# Altium PCB 贴锁控制板201105.PcbDoc
Units mm, origin at the board's own origin, x right, y up, seen from the top; angles counter-clockwise.
Board outline 47.43 x 32.39 mm, 2 copper layers (Top Layer, Bottom Layer); 70 components, 53 nets, 217 pads, 159 vias.
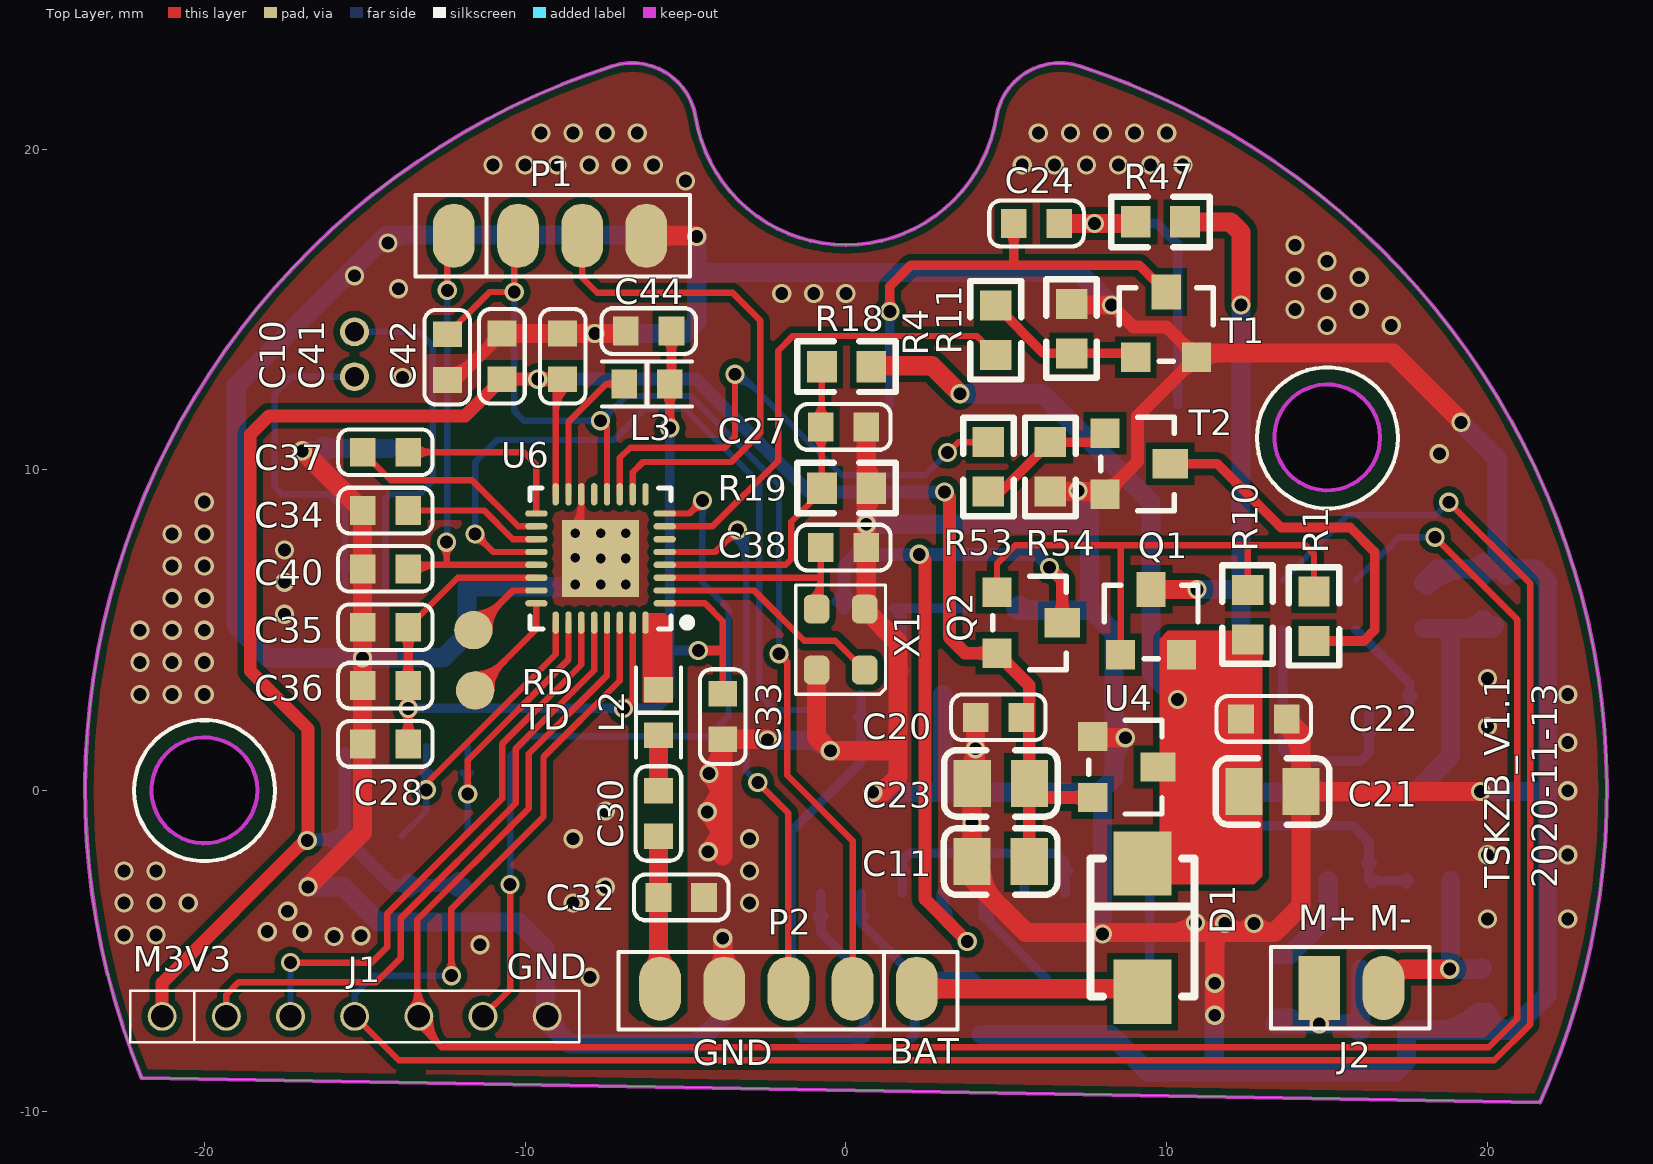
[diagram p0: Top Layer view]
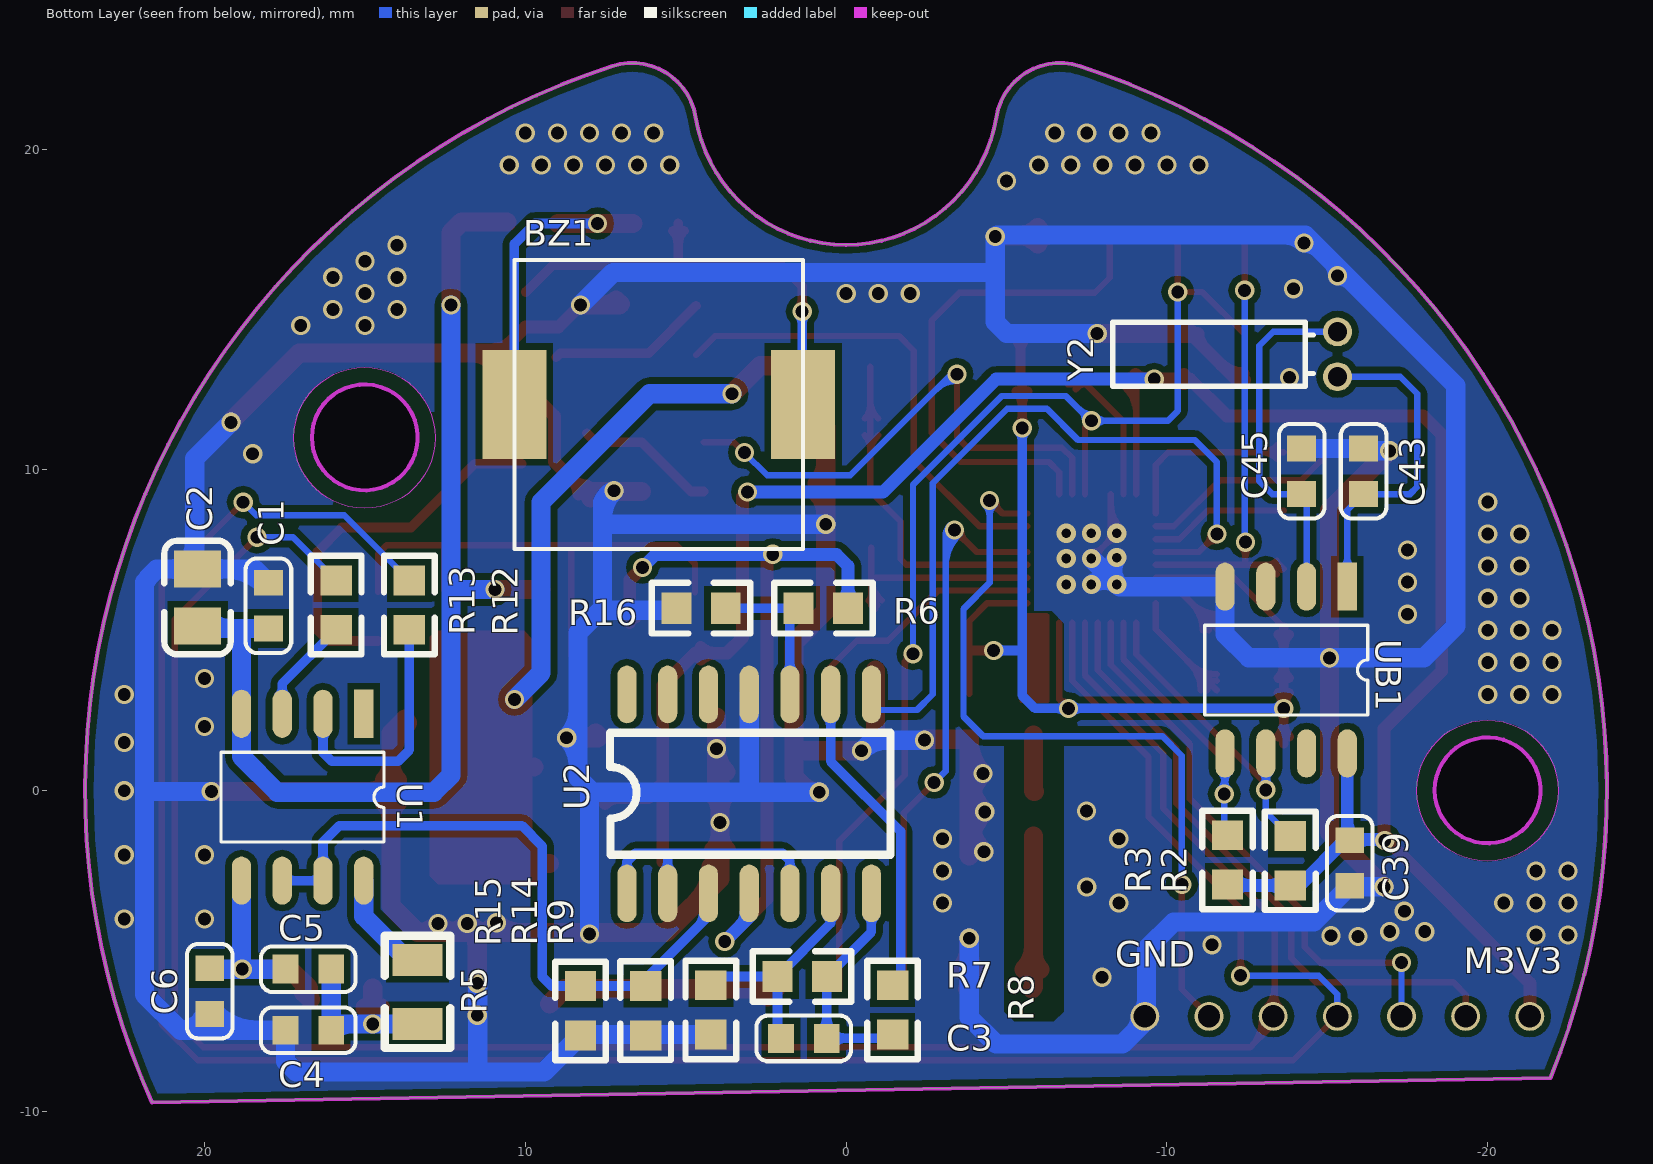
[diagram p1: Bottom Layer view, seen from below]
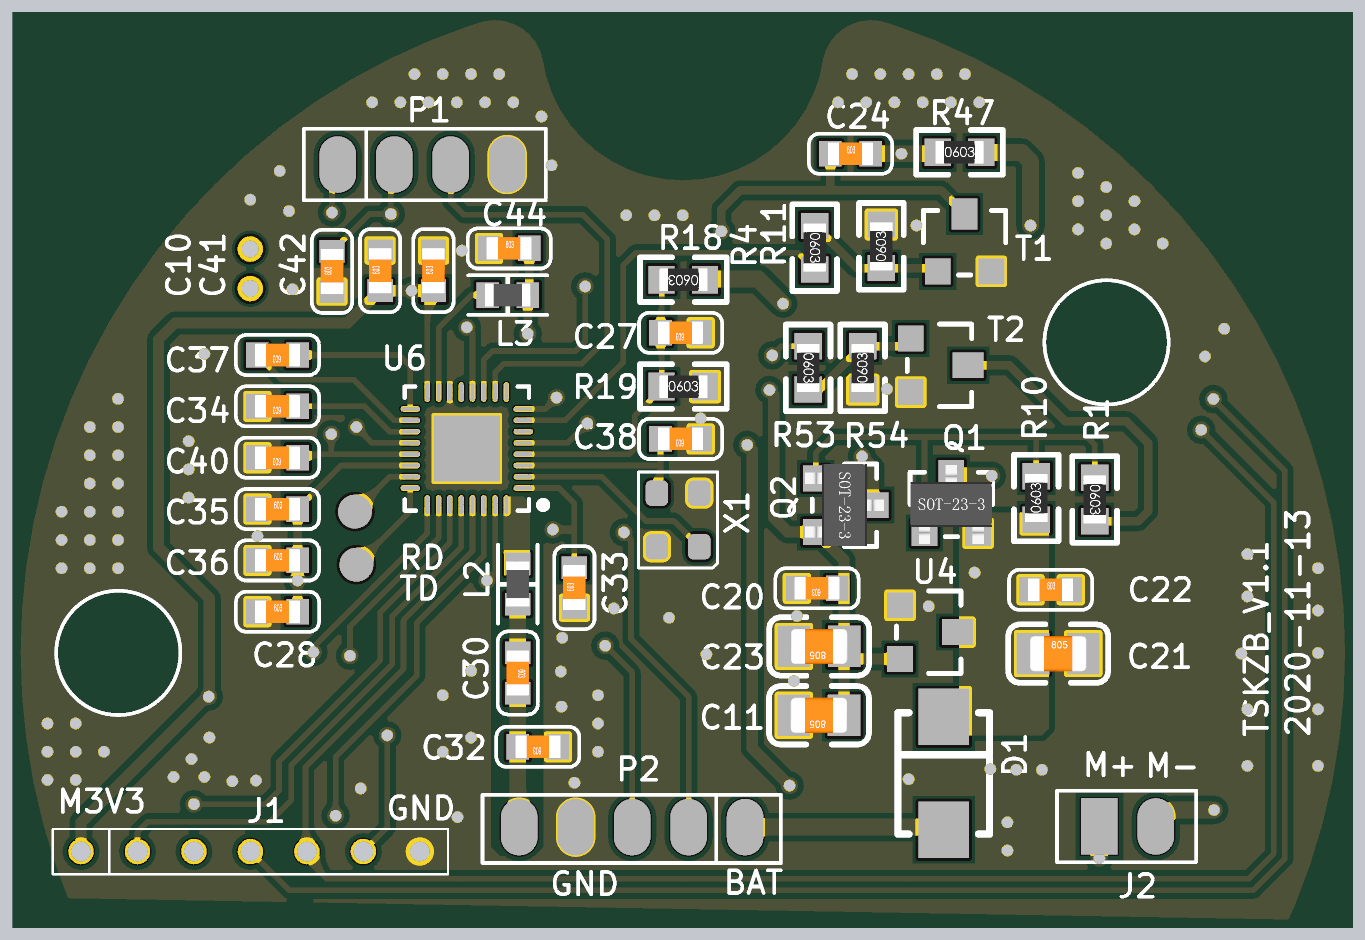
[diagram p2: 3D render of the assembled board from above, using the file's embedded part models]
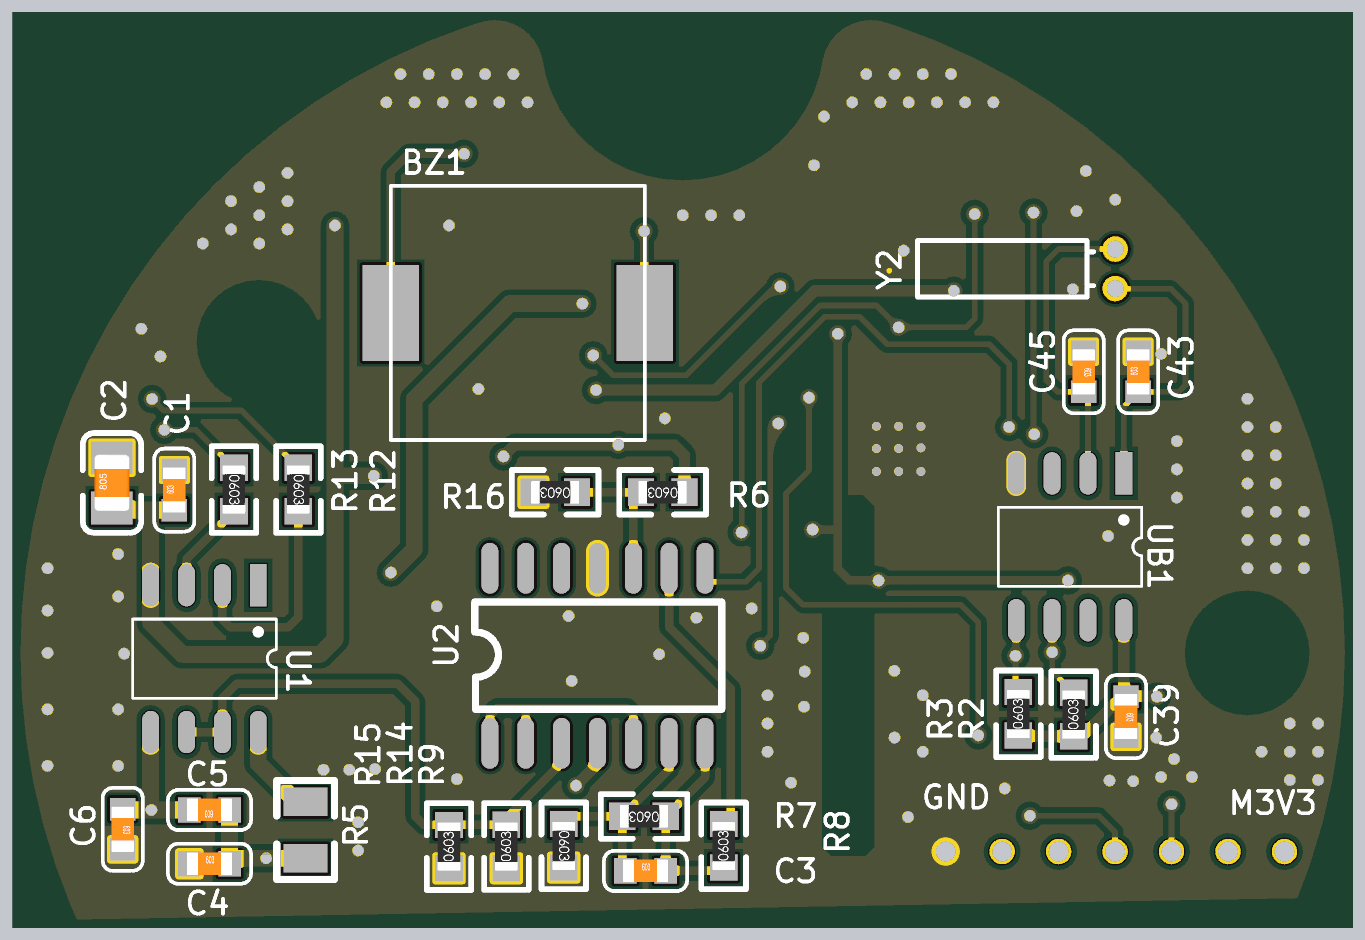
[diagram p3: 3D render of the assembled board from below, using the file's embedded part models]

## Layer stack, top to bottom
Top Layer: signal copper 0.0356
Dielectric: dielectric 0.32, FR-4, Dk 4.8
Bottom Layer: signal copper 0.0356

## Board outline
-21.952,-8.954 21.636,-9.715 ccw(c0.005,0.012) 7.281,22.585 ccw(c6.668,20.681) 4.694,21.001 cw(c0.005,21.762) -4.684,21.001 ccw(c-6.658,20.681) -7.272,22.585 ccw(c0.005,0.012)
cut-out: -21.645,0.012 ccw(c-19.995,0.012) -19.995,-1.638 ccw(c-19.995,0.012) -18.345,0.012 ccw(c-19.995,0.012) -19.995,1.662 ccw(c-19.995,0.012)
cut-out: 13.355,11.012 ccw(c15.005,11.012) 15.005,9.362 ccw(c15.005,11.012) 16.655,11.012 ccw(c15.005,11.012) 15.005,12.662 ccw(c15.005,11.012)

## Design rules (kind name [scope] priority, off if disabled: settings)
Clearance Clearance_1 [All] p1 off: gap=0.3
Clearance [All] p2: gap=0.2
HoleToHoleClearance [All] p1: gap=0 allowstackedmicrovias=TRUE
MinimumSolderMaskSliver [All] p1: minsoldermaskwidth=0
PolygonConnect [All] p1: connectstyle=Direct reliefconductorwidth=0.254 reliefentries=4 polygonreliefangle="90 Angle" airgapwidth=0.254
RoutingVias [All] p1: holewidth=0.4 width=0.6 viastyle="Through Hole" minholewidth=0.3 minwidth=0.5 maxholewidth=0.4 maxwidth=0.6
SilkToSilkClearance [All] p1: silktosilkclearance=0
SilkToSolderMaskClearance [IsPad] p1: minsilkscreentomaskgap=0 clearancetoexposedcopper=TRUE
SolderMaskExpansion [All] p1: expansion=0.102
Width [All] p1: maxlimit=1.5 minlimit=0.1 preferedwidth=0.3
24 further rules are at their usual default settings.

## Components (designator, comment, footprint, x,y, rotation, side; value= is the part's Value field where it differs from the comment)
BZ1 "BUZZER" BUZZER_9*9*1.8 5.842,12.04 r180 bottom
C1 "0.1uF" 0603C 18.009,5.766 r90 bottom
C2 "22uF" LC-0805_C 20.218,6.02 r90 bottom
C3 "0.1uF" 0603C 1.321,-7.722 r180 bottom
C4 "100nF" 0603C 16.764,-7.468 r180 bottom
C5 "100nF" 0603C 16.764,-5.563 r0 bottom
C6 "100nF" 0603C 19.837,-6.248 r270 bottom
C10 "NC" 0603C -12.421,13.513 r90 top
C11 "22uF" LC-0805_C 4.826,-2.21 r180 top
C20 "0.1uF" 0603C 4.755,2.286 r180 top
C21 "22uF/10V" LC-0805_C 13.298,-0.025 r0 top
C22 "0.1uF" 0603C 13.03,2.235 r0 top
C23 "10uF/10V" LC-0805_C 4.832,0.229 r180 top
C24 "10uF/10V" 0603C 5.944,17.678 r0 top
C27 "1nF" 0603C -0.076,11.338 r180 top
C28 "1uF/6.3V" 0603C -14.351,1.457 r0 top
C30 "1.5pF" 0603C -5.842,-0.711 r270 top
C32 "1pF" 0603C -5.131,-3.327 r180 top
C33 "0.1uF" 0603C -3.835,2.311 r90 top
C34 "0.1uF" 0603C -14.351,8.732 r180 top
C35 "1uF" 0603C -14.351,5.095 r0 top
C36 "0.1uF" 0603C -14.351,3.276 r0 top
C37 "0.1uF" 0603C -14.351,10.551 r180 top
C38 "2.7pF" 0603C -0.076,7.579 r180 top
C39 "0.1uF" 0603C -15.697,-2.257 r270 bottom
C40 "1nF" 0603C -14.351,6.913 r180 top
C41 "10uF/6.3V" 0603C -10.719,13.538 r90 top
C42 "0.1uF" 0603C -8.826,13.538 r90 top
C43 "22pF" 0603C -16.129,9.957 r90 bottom
C44 "10uF/6.3V" 0603C -6.147,14.326 r0 top
C45 "22pF" 0603C -14.199,9.957 r270 bottom
D1 "SS14" DO-214AA 9.246,-4.267 r270 top
J1 "7P" "7P-2.0MM - duplicate" -21.311,-7.036 r0 top
J2 "CON2" 2PH-2.0 14.757,-6.147 r0 top
L2 "2nH" 0603L -5.842,2.438 r90 top
L3 "2.2uH" 0603L -6.198,12.675 r180 top
P1 "按键板接口" B4B-PH -12.217,17.297 r0 top
P2 "电池盒" B5B-PH 2.21,-6.172 r180 top
Q1 "SI2301" "SOT-23 - GDS" 9.513,5.258 r0 top
Q2 "SI2301" "SOT-23 - GDS" 5.729,5.232 r270 top
R1 "1K" LC-0603_R 14.593,5.436 r270 top
R2 "10K" LC-0603_R -13.843,-2.184 r90 bottom
R3 "10K" LC-0603_R -11.887,-2.159 r90 bottom
R4 "1K" LC-0603_R 4.674,14.351 r270 top
R5 "2.2R" 0805_R 13.36,-6.274 r90 bottom
R6 "200K" LC-0603_R 0.711,5.69 r0 bottom
R7 "100K" LC-0603_R 1.372,-5.791 r0 bottom
R8 "100K" LC-0603_R -1.448,-6.833 r90 bottom
R9 "10K" LC-0603_R 4.216,-6.833 r270 bottom
R10 "100K" LC-0603_R 12.522,5.486 r90 top
R11 "10K" LC-0603_R 7.036,14.402 r90 top
R12 "10K" LC-0603_R 13.614,5.785 r270 bottom
R13 "10K" LC-0603_R 15.897,5.785 r270 bottom
R14 "0R68" LC-0603_R 6.248,-6.858 r90 bottom
R15 "0R68" LC-0603_R 8.28,-6.861 r90 bottom
R16 "100K" LC-0603_R 4.521,5.69 r0 bottom
R18 "500K%1" LC-0603_R 0.022,13.218 r180 top
R19 "100K%1" LC-0603_R 0.022,9.433 r0 top
R47 "10R" LC-0603_R 9.804,17.729 r0 top
R53 "1K" LC-0603_R 4.445,10.095 r270 top
R54 "10K" LC-0603_R 6.375,10.095 r90 top
T1 "SS8050" SOT-23-3L 9.982,14.529 r0 top
T2 "PMBT3904" SOT-23-3L 9.093,10.187 r270 top
U1 "CP2117" SOP8 16.942,-0.203 r270 bottom
U2 "LMV324B-SR" SOIC-14_L8.7-W3.9-P1.27-LS6.0-BL 3.023,-0.102 r180 bottom
U4 "HT7533" SOT-23-3L 8.712,0.737 r270 top
U6 "BK3431Q" QFN32_4*4*0.4 -7.645,7.239 r180 top
UB1 "PCF8563" SOP8 -13.716,3.759 r270 bottom
X1 "16MHZ" XTAL3225 -0.162,4.709 r90 top
Y2 "32.768KHZ" 晶振-9 -15.316,12.903 r90 bottom

## Footprints (in the part's own frame and the unit in brackets; to place one, negate y for a bottom-side part, rotate by r counter-clockwise, add the part's x,y. Pads: shape width x height; smd on the part's side, far side on the other; paste and mask are expansions set on the pad)
2PH-2.0 [mm]
  rect 1.3x2 smd mask+0.05: 1(0,0)
  oval 1.3x2 smd mask+0.05: 2(2,0)
  silkscreen extent -1.5,-1.27 3.43,1.27
"7P-2.0MM - duplicate" [mm]
  round 0.9 hole 0.7 mask+0.05: 1(0,0) 2(2,0) 3(4,0) 4(6,0) 5(8,0) 6(10,0) 7(12,0)
  silkscreen extent -1,-0.8 13,0.8
0603C [mm]
  rect 0.8x0.9 smd: 1(-0.711,0) 2(0.711,0)
  silkscreen extent -1.47,-0.71 1.47,0.71, body extent -0.8,-0.4 0.8,0.4, height 0.3
0603L [mm]
  rect 0.8x0.9 smd: 1(-0.711,0) 2(0.711,0)
  silkscreen extent -1.4,-0.7 1.4,0.7, body extent -0.82,-0.41 0.82,0.41, height 0.46
0805_R [mm]
  rect 1x1.55 smd: 1(-1,0) 2(1,0)
  silkscreen extent -1.75,-1.02 1.75,1.02
B4B-PH [mm]
  oval 1.3x2 smd mask+0.05: 1(0,0) 2(2,0) 3(4,0) 4(6,0)
  silkscreen extent -1.2,-1.27 7.37,1.27
B5B-PH [mm]
  oval 1.3x2 smd mask+0.05: 1(0,0) 2(2,0) 3(4,0) 4(6,0) 5(8,0)
  silkscreen extent -1.27,-1.14 9.3,1.27
BUZZER_9*9*1.8 [mm]
  rect 2x3.4 smd: 1(-4.5,0) 2(4.5,0)
  silkscreen extent -4.5,-4.5 4.5,4.5
DO-214AA [mm]
  rect 2x1.8 smd: 1(2,0) 2(-2,0)
  silkscreen extent -2.15,-1.63 2.15,1.63
LC-0603_R [mm]
  rect 0.93x0.98 smd: 1(-0.77,0) 2(0.77,0)
  silkscreen extent -1.53,-0.79 1.54,0.79, body extent -0.85,-0.4 0.85,0.4, height 0.56
LC-0805_C [mm]
  rect 1.16x1.47 smd: 1(-0.89,0) 2(0.89,0)
  silkscreen extent -1.77,-1.04 1.77,1.04, body extent -1,-0.62 1,0.63, height 0.77
QFN32_4*4*0.4 [mm]
  rect 2.4x2.4 smd paste-0.025 mask+0.051: 0(0,0)
  oval 0.7x0.2 smd paste-0.025 mask+0.051: 1(-2,1.4) 2(-2,1) 3(-2,0.6) 4(-2,0.2) 5(-2,-0.2) 6(-2,-0.6) 7(-2,-1) 8(-2,-1.4) 17(2,-1.4) 18(2,-1) 19(2,-0.6) 20(2,-0.2) 21(2,0.2) 22(2,0.6) 23(2,1) 24(2,1.4)
  oval 0.2x0.7 smd paste-0.025 mask+0.051: 9(-1.4,-2) 10(-1,-2) 11(-0.6,-2) 12(-0.2,-2) 13(0.2,-2) 14(0.6,-2) 15(1,-2) 16(1.4,-2) 25(1.4,2) 26(1,2) 27(0.6,2) 28(0.2,2) 29(-0.2,2) 30(-0.6,2) 31(-1,2) 32(-1.4,2)
  silkscreen extent -2.82,-2.2 2.2,2.2
SOIC-14_L8.7-W3.9-P1.27-LS6.0-BL [mm]
  oval 0.6x1.798 smd: 1(-3.81,-3.1) 2(-2.54,-3.1) 3(-1.27,-3.1) 4(0,-3.1) 5(1.27,-3.1) 6(2.54,-3.1) 7(3.81,-3.1) 8(3.81,3.1) 9(2.54,3.1) 10(1.27,3.1) 11(0,3.1) 12(-1.27,3.1) 13(-2.54,3.1) 14(-3.81,3.1)
  silkscreen extent -4.34,-1.9 4.4,1.91
SOP8 [mm]
  rect 1.5x0.6 smd mask+0.05: 1(-2.6,1.905)
  oval 1.5x0.6 smd mask+0.05: 2(-2.6,0.635) 3(-2.6,-0.635) 4(-2.6,-1.905) 5(2.6,-1.905) 6(2.6,-0.635) 7(2.6,0.635) 8(2.6,1.905)
  round 0.4 on Bottom Overlay mask+0.05: ""(-0.949,1.905)
  silkscreen extent -1.4,-2.54 1.4,2.54
"SOT-23 - GDS" [mil]
  rect 36x43.31 smd: D(0,40)
  rect 36x36 smd: G(-37.4,-40) S(37.4,-40)
  silkscreen extent -57,-45 58,45, body extent -57,-55 57,55, height 47
SOT-23-3L [mil]
  rect 36x36 smd: 1(-37.4,-40) 2(37.4,-40)
  rect 36x43.31 smd: 3(0,40)
  silkscreen extent -57,-45 58,45
XTAL3225 [mm]
  rrect50% 0.9x0.8 smd: 1(-0.95,-0.75) 2(0.95,-0.75) 3(0.95,0.75) 4(-0.95,0.75)
  silkscreen extent -1.7,-1.4 1.7,1.4
晶振-9 [mm]
  round 0.9 hole 0.6: 1(0,0) 2(1.4,0)
  rect 0x0 smd: 3(0.635,8)
  silkscreen extent -0.3,0.76 1.7,7

## Part data
BZ1: "Buzzer"
C1 C2 C3 C11 C20 C22 C27: library part CAP-NP, "Capacitor, Ceramic"
C4 C5 C6 C10: library part "CAP NP"
C21 C23: library part CAP-P, "Capacitor, tolerance ±20%"
C24: library part C_0_Dup1
C28 C30 C32 C33 C34 C35 C36 C37 C38 C41 C42 C44: library part Cap, "Capacitor"
C39 C40 C43 C45: library part C
D1: library part D
L2 L3: "Power Inductor, 4.7uH, 0.7A, 260mR DCR"
P1: library part "Header 4_1", "Header, 4-Pin"
P2: library part "Header 5", "Header, 5-Pin"
Q1 Q2: library part PWRMOSFET_EP_DGS_0
R1 R6 R10 R16 R53 R54: library part R
R2 R3: library part RES
R4 R5 R11 R14 R15 R47: library part R_Dup1
R7 R8 R9 R12 R13: library part Pro71C3.TMP_UnNamed_1
R18 R19: library part Res2, "Resistor"
T1 T2: library part NPN_BJT, "Bipolar Junction Transistor"
U1: library part AM24LC02_0
U4: library part XC6206P302M
UB1: library part IC8
Y2: library part 晶振

## Free pads (board coordinates)
  round 1.2 smd: 1(-11.608,5.004) 2(-11.557,3.124)

## Via types
v1: diameter 0.6, hole 0.4, Top Layer to Bottom Layer, tented both sides, 150 vias
v2: diameter 0.6, hole 0.3, Top Layer to Bottom Layer, tented both sides, 9 vias

## Nets (pads, with @x,y where several pads share a name; then routed paths per layer and width w, separated by ;. In a path a pad name is that pad's centre, name@x,y a point inside that pad or via, vN(x,y) a via of type N, cw(c..) or ccw(c..) an arc to the next point about the centre after c; other vN are vias at no path point)
BAT_ADC: C27.2 R18.2 R19.1 U6.4 | length 12.7
  Top Layer w0.2: U6.4 -1.876,7.039 -1.702,7.214 -1.702,8.382 -0.748,9.336 R19.1 R18.2 ; C27.2@-1,11.076 cw(c-1.607,10.468) -0.748,10.468 ; C27.2@-1,11.6 ccw(c-1.607,12.208) -0.748,12.208 ; -0.748,10.659 cw(c-0.158,10.659) C27.2@-0.575,11.076 ; -0.748,12.017 ccw(c-0.158,12.017) C27.2@-0.575,11.6
BEEP: R4.2 U6.7 | length 15
  Top Layer w0.2: U6.7 -4.156,8.239 -2.108,10.287 -2.108,13.716 -1.651,14.173 4.081,14.173 R4.2
DECT_L_R: U6.6
EN_FAULT: U2.8 U6.20 | length 24.7
  Top Layer w0.2: v1@-11.557,7.801 cw(c-11.557,7.318) -11.216,7.66 cw(c-10.874,8.001) v1@-11.357,8.001 ; v1(-11.557,8.001) -10.995,7.439 U6.20
  Bottom Layer w0.2: v1(-11.557,8.001) -11.557,10.236 -10.862,10.932 -7.229,10.932 -6.258,11.903 -5.02,11.903 -2.699,9.582 -2.699,3.004 -2.21,2.515 -0.94,2.515 -0.787,2.667 U2.8
GND: C1.2 C2.2 C4.1 C6.2 C10.1 C11.2 C20.2 C21.2 C22.2 C23.2 C27.1 C28.1 C32.1 C33.1 C34.2 C35.1 C36.1 C38.1 C39.2 C40.2 C41.2 C42.2 C43.2 C44.1 C45.1 J1.7 P1.4 P2.4 R9.2 R11.2 R14.1 R15.1 R16.2 R19.2 R54.1 T1.2 T2.2 U2.11 U4.1 U6.0 U6.14 UB1.4 X1.2 X1.4 | length 317.1
  Top Layer w0.2: U6.0@-8.574,8.168 ccw(c-9.368,8.962) U6.14@-8.245,8.962 ; U6.0@-8.433,7.826 cw(c-8.433,7.344) -8.091,7.685 cw(c-7.75,8.026) U6.0@-8.233,8.026 ; v2(-8.433,8.026) ccw(c-8.885,8.479) -8.245,8.479 ; U6.14 -8.245,7.839 v2(-7.645,7.239) ; U6.0@-7.845,7.239 ccw(c-8.328,7.239) -7.987,7.58 ccw(c-7.645,7.922) U6.0@-7.645,7.439
  Top Layer w0.4: C10.1 -12.167,12.802 C41.2 ; C10.1@-12.371,13.002 ccw(c-12.371,13.977) -11.681,13.287 ; -11.146,13.823 ccw(c-11.572,14.249) C41.2@-10.969,14.249 ; T2.2 9.093,10.253 9.093,11.674 T1.2 9.992,14.453 8.966,14.453 v1(8.28,15.138) ; T2.2@8.077,9.495 ccw(c8.077,10.116) 8.516,9.677 ccw(c8.955,9.237) T2.2@8.334,9.237 ; T1.2@10.932,13.256 ccw(c10.932,12.635) 10.493,13.074 ccw(c10.054,13.513) 10.675,13.513 ccw(c10.054,13.513) 10.493,13.952 ccw(c10.932,14.391) T1.2@10.932,13.77
  Top Layer w0.6: v1(-16.942,10.592) -16.922,10.592 C34.2 C40.2 C35.1 v1(-15.062,4.14) C36.1 C28.1 -15.062,-1.295 v1(-16.764,-2.997) ; C41.2 C42.2 v1(-7.823,14.249) C44.1@-6.934,14.249 ; P1.4 -4.674,17.297 v1(-4.648,17.272) ; P1.4@-5.97,17.05 cw(c-5.372,16.452) -5.372,17.297 cw(c-5.372,18.142) P1.4@-5.97,17.545 ; v1(-4.293,-1.905) ccw(c-5.396,-0.801) -3.835,-0.801 ; P2.4@-4.038,-5.575 ccw(c-4.526,-5.086) -3.835,-5.086 ; v1@-3.835,-4.868 ccw(c-2.836,-4.868) P2.4@-3.543,-5.575 ; v1(-3.835,-4.597) -3.835,-6.127 P2.4 ; -3.835,-2.032 C33.1 -2.464,1.6 v1(-2.438,1.575) ; -3.835,-1.826 ccw(c-5.483,-1.826) v1(-4.318,-0.66) ccw(c-5.483,0.505) -3.835,0.505 ; -3.835,-0.509 ccw(c-5.31,-0.509) v1(-4.267,0.533) ccw(c-5.31,1.576) C33.1@-3.835,1.576 ; X1.4 -0.912,1.674 v1(-0.483,1.245) 1.6,1.245 1.626,1.27 ; 0.635,8.63 cw(c1.57,8.63) R19.2@0.909,9.291 ; R19.2@0.635,9.433 C27.1 ; 0.635,10.236 ccw(c1.57,10.236) R19.2@0.909,9.575 ; R19.2 0.635,9.276 v1(0.635,8.306) C38.1 0.635,5.706 X1.2 1.626,4.621 1.626,1.27 ; v1(0.838,-0.051) ccw(c0.838,0.685) 1.359,0.165 ; 1.143,-0.051 1.626,0.432 1.626,1.27 ; C11.2@3.738,-1.857 ccw(c3.26,-1.379) 3.936,-1.379 ccw(c4.612,-1.379) C11.2@4.134,-1.857 ; C23.2@3.744,-0.124 cw(c3.279,-0.589) 3.936,-0.589 ; C23.2@3.744,0.582 ccw(c3.018,1.307) v1(4.044,1.307) ; 3.936,-0.616 cw(c4.631,-0.616) C23.2@4.14,-0.124 ; C23.2 3.936,0.223 v1(3.936,-0.993) C11.2 3.936,-2.742 5.613,-4.42 11.455,-4.42 ; C23.2@4.044,0.229 v1(4.044,1.307) ; C20.2 v1(4.044,1.307) ; C11.2@4.216,-2.365 ccw(c5.803,-2.365) 4.681,-3.487 ; R54.1 T2.2@7.989,9.326 ; R11.2 7.069,15.138 v1(8.28,15.138) ; R11.2@7.177,15.288 ccw(c7.54,15.651) 7.54,15.138 ; v1@7.485,9.326 cw(c7.485,8.645) T2.2@7.966,9.126 ; U4.1 7.732,1.651 v1(8.712,1.651) ; U4.1@7.807,1.798 ccw(c8.162,2.152) 8.162,1.651 ; 10.161,-4.42 ccw(c10.161,-3.379) v1(10.897,-4.115) ccw(c11.455,-3.755) 11.455,-4.42 ; T1.2@11.043,13.402 cw(c11.618,12.827) 11.618,13.64 ; T1.2@11.059,13.64 17.043,13.64 19.101,11.582 19.101,11.557 v1(19.177,11.481) ; 11.136,-4.42 ccw(c11.136,-3.466) v1(11.811,-4.14) ; v1(11.5,-7) v1(11.5,-6) 11.5,-4.464 11.455,-4.42 ; 11.5,-4.891 cw(c12.562,-4.891) v1(11.811,-4.14) ; 11.5,-4.589 cw(c11.98,-4.589) v1(11.811,-4.14) ; 12.051,-4.42 ccw(c12.051,-3.466) v1(12.725,-4.14) ccw(c13.36,-3.558) 13.36,-4.42 ; 12.486,-4.42 cw(c12.486,-3.466) v1(11.811,-4.14) ; C22.2@13.671,2.114 cw(c12.422,0.866) 14.188,0.866 ; C22.2@13.733,2.086 cw(c13.688,1.588) 14.188,1.588 ; C22.2 14.188,1.789 C21.2 ; C21.2@13.99,-0.378 cw(c13.512,-0.856) 14.188,-0.856 cw(c14.864,-0.856) C21.2@14.386,-0.378 ; C21.2@13.99,0.328 ccw(c13.512,0.806) 14.188,0.806 ccw(c14.864,0.806) C21.2@14.386,0.328 ; C21.2@14.386,-0.223 cw(c14.864,-0.701) 14.864,-0.025 cw(c14.864,0.651) C21.2@14.386,0.173 ; v1(19.787,-0.025) C21.2 ; 11.455,-4.42 ccw(c11.455,-4.054) v1(11.811,-4.14) ; 11.455,-4.42 ccw(c11.455,-4.054) v1(11.811,-4.14) ; 11.455,-4.42 13.36,-4.42 ; 13.36,-4.42 14.188,-3.592 C21.2
  Bottom Layer w0.6: v1(-16.942,10.592) -16.205,10.592 C43.2 C45.1 ; v1(-16.764,-2.997) C39.2@-15.726,-2.997 ; -16.604,10.592 ccw(c-16.604,11.093) C43.2@-16.25,10.739 ; -15.763,15.868 cw(c-15.316,15.421) v1(-15.316,16.053) cw(c-14.685,16.053) -15.131,16.499 ; C39.2 -14.576,-4.089 -10.211,-4.089 -9.361,-4.939 -9.361,-6.045 -9.361,-7.149 -8.611,-7.899 -4.674,-7.899 -3.835,-7.061 v1(-3.835,-4.597) ; -14.765,16.866 cw(c-14.275,16.376) v1(-14.275,17.069) cw(c-13.662,16.456) -13.662,17.323 ; -9.361,-6.551 ccw(c-8.826,-6.551) J1.7@-9.205,-6.93 ; J1.7@-9.161,-7.036 ccw(c-8.403,-7.036) -8.939,-7.571 ; v2(-8.433,7.264) cw(c-9.034,6.869) v2@-8.525,6.359 ; v1(-7.823,14.249) -5.004,14.249 -4.648,14.605 -4.648,16.154 ; v2(-7.645,6.426) ccw(c-8.046,5.88) v2@-8.525,6.359 ; v2(-7.645,7.239) v2@-8.525,6.359 ; v1(-2.438,1.575) -0.813,1.575 v1(-0.483,1.245) ccw(c-1.28,0.447) -1.28,1.575 ; v1(0.635,8.306) 7.595,8.306 ; v1(0.838,-0.051) 3.023,-0.051 ; U2.11 3.023,-0.051 ; R9.2 8.252,-7.603 R15.1 9.42,-8.771 11.481,-8.771 ; R16.2 5.355,5.626 7.658,5.626 8.357,4.928 8.357,1.676 ; R16.2@5.408,5.781 ccw(c5.782,6.156) 5.782,5.626 ; 7.595,5.904 7.595,8.306 ; 7.595,8.489 ccw(c6.381,8.489) v1(7.239,9.347) ; 7.595,8.844 ccw(c7.061,8.844) v1(7.239,9.347) ; 7.788,-7.603 cw(c7.788,-8.099) R15.1@8.139,-7.748 ; v1(8.001,-4.47) 8.001,-0.152 7.899,-0.051 ; v1(8.28,15.138) 7.264,16.154 -4.648,16.154 ; 8.357,0.793 cw(c9.571,0.793) v1(8.712,1.651) ; 8.357,2.509 ccw(c9.571,2.509) v1(8.712,1.651) ; v1@11.481,-6.019 11.481,-8.771 ; C1.2 18.441,6.91 C2.2 21.487,6.91 21.759,6.638 21.759,6.611 21.869,6.5 21.869,-0.025 ; C1.2@18.129,6.406 cw(c19.345,5.191) 19.345,6.91 ; 18.32,-7.468 ccw(c18.32,-5.492) C6.2@19.717,-6.889 ; v1(19.177,11.481) 20.307,10.351 C2.2@20.307,6.999 ; C6.2@19.417,-7.129 ccw(c19.899,-6.956) 19.899,-7.468 ; 19.768,-7.468 ccw(c19.768,-6.94) C6.2@20.141,-7.313 ; v1(19.787,-0.025) 21.869,-0.025 ; C2.2@19.865,6.712 ccw(c19.387,6.234) 19.387,6.91 ccw(c19.387,7.586) C2.2@19.865,7.108 ; C6.2@19.982,-6.926 ccw(c20.752,-6.649) 20.752,-7.468 ; 20.307,7.746 ccw(c21.209,7.746) 20.571,7.108 ccw(c21.049,7.586) 21.049,6.91 ccw(c21.049,6.234) C2.2@20.571,6.712 ; v2@-8.525,6.359 UB1.4 -11.811,4.877 -12.548,4.14 v1(-15.062,4.14) -18.009,4.14 -19.003,5.135 -19.003,12.628 -14.308,17.323 -4.699,17.323 v1(-4.648,17.272) -4.648,16.154 ; 3.023,-0.051 7.899,-0.051 ; v1(7.239,9.347) 7.595,8.992 7.595,8.306 ; 7.899,-0.051 8.357,0.406 8.357,1.676 ; 8.357,1.676 8.382,1.651 v1(8.712,1.651) ; 11.481,-8.771 17.137,-8.771 17.475,-8.433 C4.1 20.752,-7.468 ; 20.752,-7.468 21.869,-6.35 21.869,-0.025
  other v1: -7.976,-5.817 -11.405,-4.801 -15.951,-4.547 -15.113,-4.521 -22.5,-4.5 -21.5,-4.5 -18.034,-4.394 -16.942,-4.394 20,-4 22.5,-4 -17.399,-3.759 -22.5,-3.5 -21.5,-3.5 -20.5,-3.5 -8.5,-3.5 -3,-3.5 -7.5,-3 -22.5,-2.5 -21.5,-2.5 -3,-2.5 20,-2 22.5,-2 -8.5,-1.5 -3,-1.5 -7.493,-0.635 22.5,0 22.5,1.5 20,2 -22,3 -21,3 -20,3 22.5,3 20,3.5 -22,4 -21,4 -20,4 -22,5 -21,5 -20,5 -17.5,5.5 -21,6 -20,6 -17.5,6.5 -21,7 -20,7 -17.5,7.5 -21,8 -20,8 -20,9 18.5,10.5 -13.818,12.878 15,14.5 17,14.5 14,15 16,15 -2,15.5 -1,15.5 0,15.5 15,15.5 -13.945,15.646 14,16 16,16 15,16.5 14,17 -5,19 -11,19.5 -10,19.5 -9,19.5 -8,19.5 -7,19.5 -6,19.5 5.5,19.5 6.5,19.5 7.5,19.5 8.5,19.5 9.5,19.5 10.5,19.5 -9.5,20.5 -8.5,20.5 -7.5,20.5 -6.5,20.5 6,20.5 7,20.5 8,20.5 9,20.5 10,20.5
  other v2: -8.433,6.426 -6.858,6.426 -6.858,7.239 -7.645,8.026 -6.858,8.026
KEYX_4: C10.2 P1.2 P2.2 U6.12 | length 39
  Top Layer w0.2: C10.2 -11.1,15.545 v1(-10.338,15.545) -10.338,17.177 P1.2 ; v1(-7.645,11.532) -7.445,11.332 U6.12 ; v1(-2.083,4.267) -1.829,4.013 ; v1@-2.037,4.072 cw(c-1.986,3.856) -1.829,4.013 ; v1@-1.888,4.221 ccw(c-1.671,4.171) -1.829,4.013 ; P2.2 0.21,-1.556 -1.829,0.483 -1.829,4.013
  Bottom Layer w0.2: v1(-10.338,15.545) -10.338,11.836 -10.033,11.532 v1(-7.645,11.532) ; v1@-7.787,11.39 ccw(c-8.128,11.049) -8.128,11.532 ccw(c-8.128,12.014) v1@-7.787,11.673 ; v1@-7.645,11.506 -6.849,12.303 -4.854,12.303 -2.083,9.532 v1(-2.083,4.267) ; v1@-7.645,11.732 ccw(c-7.645,12.276) -7.261,11.891 ; v1@-7.445,11.532 cw(c-7.024,11.532) -7.322,11.83
KEYY_1: P2.3 U6.5 | length 20.5
  Top Layer w0.2: U6.5 -4.067,7.439 v1(-3.378,8.128) ; v1@-3.578,8.128 cw(c-4.061,8.128) -3.72,7.787 cw(c-3.378,7.445) v1@-3.378,7.928 ; v1(-2.743,0.254) -1.79,-0.699 P2.3
  Bottom Layer w0.2: v1@-3.52,7.987 cw(c-4.536,6.971) -3.099,6.971 ; v1@-3.237,8.269 cw(c-3.57,7.936) -3.099,7.936 ; -3.099,7.453 ccw(c-4.053,7.453) v1(-3.378,8.128) -3.099,7.849 -3.099,0.61 v1(-2.743,0.254)
KEYY_3: P1.3 U6.10 | length 16.1
  Top Layer w0.2: P1.3 -8.217,15.99 -7.747,15.519 -3.531,15.519 -2.667,14.656 -2.667,11.151 -3.572,10.246 -6.325,10.246 -6.645,9.925 U6.10
M3V3: C11.1 C20.1 C23.1 C39.1 C41.1 C42.1 J1.1 Q2.S R2.1 R3.1 U4.2 U6.16 UB1.8 | length 85.3
  Top Layer w0.2: U6.16 -9.045,12.608 C42.1 ; -9.045,11.695 cw(c-7.744,11.695) C42.1@-8.664,12.615 ; -9.045,12.178 cw(c-8.227,12.178) C42.1@-8.806,12.756
  Top Layer w0.4: J1.1 -21.311,-5.994 ; -19.431,-4.115 -21.311,-5.994 ; -17.09,-1.774 cw(c-16.789,-2.075) v1@-16.789,-1.649 ; v1@-16.86,-1.479 ccw(c-17.092,-1.247) -16.764,-1.247 ; C41.1@-10.527,12.686 cw(c-10.186,12.344) -10.186,12.827 cw(c-10.186,13.31) C41.1@-10.527,12.968 ; v1@-9.548,12.742 cw(c-9.33,12.39) C42.1@-9.223,12.79 ; v1@-9.548,12.912 ccw(c-9.33,13.264) C42.1@-9.223,12.864 ; C42.1@-9.018,12.686 ccw(c-9.359,12.344) -9.359,12.827 ccw(c-9.359,13.31) C42.1@-9.018,12.968 ; C42.1 v1(-9.601,12.827) C41.1 -11.862,11.684 -17.983,11.684 -18.567,11.1 -18.567,3.734 -16.764,1.93 -16.764,-1.448 -21.311,-5.994 ; v1(3.073,9.309) 3.226,9.157 3.226,4.775 3.719,4.282 Q2.S 5.716,3.279 C11.1 ; Q2.S@4.531,4.101 ccw(c4.092,3.661) 4.092,4.282 ccw(c4.092,4.903) Q2.S@4.531,4.464 ; C23.1 6.164,-0.213 U4.2 ; U4.2@7.514,-0.395 ccw(c7.075,-0.834) 7.075,-0.213 ccw(c7.075,0.408) U4.2@7.514,-0.032
  Bottom Layer w0.4: v1@-16.789,-1.524 -15.719,-1.524 C39.1 ; v1@-16.719,-1.62 cw(c-16.487,-1.852) -16.487,-1.524 ; -16.283,-1.524 cw(c-16.283,-2.082) C39.1@-15.889,-1.688 ; -16.177,-1.524 ccw(c-16.177,-1.117) C39.1@-15.889,-1.405 ; C39.1@-15.789,-1.405 ccw(c-16.193,-1) -15.621,-1 ; -15.621,-1.127 ccw(c-15.228,-1.127) C39.1@-15.506,-1.405 ; UB1.8 -15.621,-1.47 -14.136,-2.954 R2.1 -11.913,-2.954 R3.1 ; R2.1@-13.631,-3.142 cw(c-13.178,-3.594) -13.178,-2.954 cw(c-13.178,-2.315) R2.1@-13.631,-2.767 ; -12.613,-2.954 ccw(c-12.613,-2.228) R3.1@-12.1,-2.742 ; -12.491,-2.954 cw(c-12.491,-3.507) R3.1@-12.1,-3.116 ; v1(-9.601,12.827) -4.671,12.827 -1.153,9.309 v1(3.073,9.309)
  other v1: -16.789,-1.549
MOTO+: C4.2 C5.1 J2.1 R5.1 | length 7.8
  Top Layer w0.6: J2.1@14.525,-6.759 cw(c14.07,-7.274) v1(14.757,-7.274) ; J2.1 v1(14.757,-7.274) ; J2.1@14.989,-6.759 ccw(c15.445,-7.274) v1(14.757,-7.274)
  Bottom Layer w0.6: R5.1 v1(14.757,-7.274) 15.859,-7.274 C4.2 ; R5.1@13.437,-7.096 R5.1@13.859,-7.096 ; 15.464,-7.274 cw(c15.464,-8.006) C4.2@15.982,-7.488 ; C4.2@16.053,-7.274 C5.1
MOTO-: C5.2 C6.1 J2.2 U1.5 | length 7.7
  Top Layer w0.6: J2.2@16.707,-6.502 J2.2@16.91,-6.299 ; J2.2 17.342,-5.563 v1(18.821,-5.563)
  Bottom Layer w0.6: C5.2 v1(18.821,-5.563) ; U1.5 18.847,-5.537 v1(18.821,-5.563) ; C6.1 19.812,-5.563 v1(18.821,-5.563)
NetBZ1_1: BZ1.1 C24.2 R47.1 | length 10.8
  Top Layer w0.6: C24.2 v1(7.747,17.678) R47.1@8.984,17.678
  Bottom Layer w0.3: v1(7.747,17.678) 9.703,17.678 10.342,17.039 BZ1.1 ; v1@7.853,17.572 cw(c8.109,17.316) 8.109,17.678 cw(c8.109,18.041) v1@7.853,17.784
NetBZ1_2: BZ1.2 C24.1 T1.3 | length 16.3
  Top Layer w0.3: v1@1.266,15.041 ccw(c1.009,15.297) 1.372,15.297 ccw(c1.734,15.297) v1@1.478,15.041 ; v1(1.372,14.935) 1.372,15.723 2.032,16.383 5.283,16.383 ; C24.1@5.056,17.452 cw(c4.629,17.025) 5.232,17.025 cw(c5.836,17.025) C24.1@5.409,17.452 ; C24.1 5.232,16.434 5.283,16.383 ; T1.3 9.144,16.383 5.283,16.383
  Bottom Layer w0.3: v1@1.266,14.829 cw(c1.009,14.573) 1.372,14.573 cw(c1.734,14.573) v1@1.478,14.829 ; BZ1.2 1.372,12.069 v1(1.372,14.935)
NetC3_1: C3.1 R7.2 R9.1 U2.6 | length 7.9
  Bottom Layer w0.3: U2.6@0.384,-3.913 cw(c0.191,-4.132) 0.483,-4.132 ; U2.6 0.483,-4.132 ; U2.6@0.582,-3.913 ccw(c0.774,-4.132) 0.483,-4.132 ; C3.1 2.142,-7.612 R7.2 ; R9.1 3.945,-5.791 R7.2 ; 0.483,-4.132 R7.2
NetC3_2: C3.2 R7.1 R8.1 U2.7 | length 9.6
  Bottom Layer w0.3: R8.1 -1.337,-7.714 0.602,-7.714 R7.1 -0.787,-4.402 U2.7 ; U2.7@-0.893,-3.907 cw(c-1.15,-4.163) -0.787,-4.163 cw(c-0.425,-4.163) U2.7@-0.681,-3.907 ; -0.013,-7.714 cw(c-0.013,-8.344) C3.2@0.433,-7.898 ; 0.025,-7.714 ccw(c0.025,-7.137) C3.2@0.433,-7.545 ; C3.2@0.433,-7.495 ccw(c0.025,-7.087) 0.602,-7.087 ; 0.602,-7.049 ccw(c1.232,-7.049) C3.2@0.786,-7.495
NetC30_1: C30.1 L2.1 | length 1.8
  Top Layer w0.6: C30.1@-5.867,-0.025 C30.1 L2.1
NetC34_1: C34.1 U6.19 | length 4.4
  Top Layer w0.2: C34.1 -11.272,8.732 -10.379,7.839 U6.19
NetC37_1: C37.1 U6.17 | length 6.8
  Top Layer w0.2: C37.1 -10.043,10.551 -9.645,10.153 U6.17 ; C37.1@-13.428,10.339 cw(c-12.916,9.826) -12.916,10.551 cw(c-12.916,11.275) C37.1@-13.428,10.763
NetC37_2: C37.2 U6.18 | length 6.4
  Top Layer w0.2: C37.2 -14.189,9.677 -11.652,9.677 -10.213,8.239 U6.18
NetC38_2: C38.2 U6.3 X1.3 | length 8.3
  Top Layer w0.2: U6.3 -0.797,6.639 -0.787,6.629 ; X1.3@-1.107,5.937 ccw(c-1.698,6.629) -0.787,6.629 ; X1.3@-0.977,5.785 ccw(c-1.328,6.196) -0.787,6.196 ; X1.3 -0.787,5.783 -0.787,6.629 ; -0.787,6.132 ccw(c-0.489,6.132) X1.3@-0.7,5.921 ; C38.2 -0.787,6.629
NetC43_1: C43.1 UB1.1 Y2.1 | length 11.2
  Bottom Layer w0.2: UB1.1@-15.762,6.951 ccw(c-16.104,7.292) -15.621,7.292 ccw(c-15.138,7.292) UB1.1@-15.48,6.951 ; UB1.1 -15.621,8.738 C43.1 -17.577,9.246 -17.805,9.474 -17.805,12.37 -17.272,12.903 Y2.1
NetC45_2: C45.2 UB1.2 Y2.2 | length 11.3
  Bottom Layer w0.2: Y2.2 -13.313,14.303 -12.878,13.868 -12.878,9.652 -13.284,9.246 C45.2 -14.351,9.093 UB1.2
NetD1_1: D1.1 P2.1 | length 8.6
  Top Layer w0.6: P2.1 8.77,-6.172 D1.1@9.246,-6.648 ; P2.1@2.457,-6.42 cw(c3.055,-7.017) 3.055,-6.172 cw(c3.055,-5.327) P2.1@2.457,-5.925
NetL2_2: L2.2 U6.32 | length 6.3
  Top Layer w0.2: -6.245,3.761 ccw(c-5.28,3.761) L2.2@-5.963,3.079 ; -6.245,4.244 ccw(c-4.797,4.244) L2.2@-5.821,3.22 ; -6.245,4.727 ccw(c-4.315,4.727) L2.2@-5.68,3.362 ; U6.32 -6.245,3.553 ; L2.2@-6.175,3.248 ccw(c-6.454,3.345) -6.245,3.553 ; L2.2@-5.932,3.447 cw(c-5.981,3.817) -6.245,3.553 ; L2.2 -6.245,3.553
NetL3_2: L3.2 U6.15 | length 5.2
  Top Layer w0.2: U6.15 -8.645,11.497 -7.468,12.675 ; L3.2@-7.159,12.509 ccw(c-7.468,12.304) -7.468,12.675 ; L3.2@-7.159,12.84 cw(c-7.468,13.045) -7.468,12.675 ; L3.2 -7.468,12.675
NetQ1_G: Q1.G Q2.G R1.1 R10.2 | length 17.1
  Top Layer w0.2: Q2.G 4.713,7.075 5.283,7.645 8.585,7.645 ; Q1.G 8.563,7.623 8.585,7.645 ; R10.2 12.522,7.645 ; R1.1 14.593,7.378 14.326,7.645 12.522,7.645 ; 8.585,7.645 12.522,7.645
NetR1_2: R1.2 T2.3 | length 12
  Top Layer w0.3: T2.3 11.58,10.187 13.564,8.204 15.723,8.204 16.485,7.442 16.485,5.004 16.146,4.666 R1.2
NetR4_1: R4.1 R11.1 T1.1 | length 5
  Top Layer w0.3: R4.1 6.163,13.632 R11.1 8.913,13.632 T1.1
NetR5_2: R5.2 U1.8 | length 3.2
  Bottom Layer w0.6: R5.2@13.437,-5.096 13.852,-5.096 15.037,-3.912 U1.8
NetR6_2: R6.2 R16.1 U2.10 | length 5.6
  Bottom Layer w0.3: U2.10@1.647,3.704 ccw(c1.39,3.96) 1.753,3.96 ccw(c2.115,3.96) U2.10@1.859,3.704 ; U2.10 1.753,5.418 R6.2 R16.1
NetR8_2: R8.2 U2.9 | length 10.6
  Bottom Layer w0.3: R8.2 -1.702,-5.809 -1.702,-1.27 0.483,0.914 U2.9 ; U2.9@0.377,2.293 cw(c0.12,2.037) 0.483,2.037 cw(c0.845,2.037) U2.9@0.589,2.293
NetR12_2: R12.2 U1.2 | length 8.5
  Bottom Layer w0.3: R12.2 13.614,1.27 13.97,0.914 16.027,0.914 16.307,1.194 U1.2 ; U1.2@16.201,1.841 cw(c15.945,1.585) 16.307,1.585 cw(c16.669,1.585) U1.2@16.413,1.841
NetR13_2: R13.2 U1.3 | length 3.9
  Bottom Layer w0.3: R13.2 17.577,3.335 U1.3 ; U1.3@17.471,2.953 ccw(c17.215,3.209) 17.577,3.209 ccw(c17.939,3.209) U1.3@17.683,2.953
NetR14_2: R14.2 R15.2 U1.6 U1.7 U2.3 | length 23.1
  Bottom Layer w0.3: U2.3 4.293,-3.912 6.248,-5.867 R14.2 8.277,-6.088 R15.2 8.284,-6.088 9.177,-6.088 9.474,-5.791 9.474,-1.727 10.109,-1.092 15.799,-1.092 16.307,-1.6 U1.7 U1.6 ; U2.3@4.443,-3.8 ccw(c5.073,-3.8) 4.627,-4.246 ; U1.7@16.201,-2.247 ccw(c15.945,-1.991) 16.307,-1.991 ccw(c16.669,-1.991) U1.7@16.413,-2.247 ; U1.7@16.413,-2.909 cw(c16.669,-3.165) 16.669,-2.803 cw(c16.669,-2.441) U1.7@16.413,-2.697 ; U1.6@17.471,-2.909 ccw(c17.215,-3.165) 17.215,-2.803 ccw(c17.215,-2.441) U1.6@17.471,-2.697
NetR53_2: R53.2 R54.2 T2.1 | length 4.4
  Top Layer w0.3: R53.2 4.835,9.325 R54.2 7.805,10.866 T2.1
NetU2_1: U2.1 U2.2 U2.5 | length 10.2
  Bottom Layer w0.3: U2.5@1.647,-2.497 ccw(c1.39,-2.241) 1.753,-2.241 ccw(c2.115,-2.241) U2.5@1.859,-2.497 ; U2.5 1.753,-2.184 1.984,-1.953 5.563,-1.953 ; U2.2@5.457,-2.497 ccw(c5.2,-2.241) 5.563,-2.241 ccw(c5.925,-2.241) U2.2@5.669,-2.497 ; U2.2 5.563,-1.953 ; U2.1@6.727,-2.497 ccw(c6.47,-2.241) 6.833,-2.241 ccw(c7.195,-2.241) U2.1@6.939,-2.497 ; U2.1 6.833,-2.21 6.575,-1.953 5.563,-1.953
NetU6_2: U6.2 X1.1 | length 7.3
  Top Layer w0.2: U6.2 -2.861,6.239 -1.295,4.674 -0.327,4.674 X1.1
P04/LED_RED: J1.3 U6.27 | length 17.5
  Top Layer w0.2: v1@-17.323,-5.359 v1(-17.311,-5.359) -14.783,-5.359 -14.3,-4.877 -14.3,-3.835 -10.716,-0.252 -10.716,1.452 -8.245,3.923 U6.27
  Bottom Layer w0.2: J1.3 v1(-17.311,-5.359)
P05/LED_GREEN: J1.2 U6.28 | length 19.5
  Top Layer w0.2: J1.2 -19.311,-6.357 -18.93,-5.976 -14.637,-5.976 -13.868,-5.207 -13.868,-3.969 -10.287,-0.388 -10.287,1.316 -7.845,3.758 U6.28
P06/MOTO1: J1.5 R13.1 U6.29 | length 72.5
  Top Layer w0.2: J1.5@-13.558,-6.788 ccw(c-14.033,-6.313) -13.361,-6.313 ; -13.361,-6.551 ccw(c-12.826,-6.551) J1.5@-13.205,-6.93 ; -13.361,-6.068 ccw(c-12.343,-6.068) J1.5@-13.063,-6.788 ; J1.5@-13.161,-7.044 ccw(c-12.321,-7.089) -12.916,-7.684 ; J1.5@-12.961,-7.055 ccw(c-11.719,-7.121) -12.598,-8.001 ; U6.29 -7.445,3.592 -9.887,1.15 -9.887,-0.554 -13.361,-4.028 -13.361,-6.045 -13.361,-7.238 -12.598,-8.001 ; v1(18.364,7.899) 20.93,5.334 20.93,-7.112 20.041,-8.001 -12.598,-8.001
  Bottom Layer w0.2: R13.1 17.242,7.899 v1(18.364,7.899)
P07/MOTO0: J1.4 R12.1 U6.30 | length 79.5
  Top Layer w0.2: J1.4 -13.939,-8.407 ; -13.538,-8.407 -13.939,-8.407 ; v1@-12.435,-5.624 ccw(c-12.776,-5.283) -12.294,-5.283 ccw(c-11.811,-5.283) v1@-12.152,-5.624 ; v1(-12.294,-5.766) -12.294,-3.683 -9.423,-0.813 -9.423,1.048 -7.045,3.426 U6.30 ; v1(18.796,8.992) 21.33,6.458 21.33,-7.287 20.209,-8.407 -13.939,-8.407
  Bottom Layer w0.2: J1.4 -15.311,-6.344 -14.732,-5.766 v1(-12.294,-5.766) ; R12.1 15.645,8.585 18.39,8.585 v1(18.796,8.992)
PWR_CTL: R53.1 U6.11 | length 17.6
  Top Layer w0.2: U6.11 -7.045,10.373 -6.725,10.693 -3.785,10.693 -3.454,11.024 v1(-3.454,12.979) ; v1(3.172,10.538) 3.499,10.865 R53.1
  Bottom Layer w0.2: v1@-3.454,12.779 cw(c-3.454,11.867) -2.809,12.512 ; -3.151,12.854 ccw(c-3.454,12.55) v1(-3.454,12.979) -3.277,12.979 -0.127,9.83 2.464,9.83 v1(3.172,10.538)
RD1_KEYX_2: pad.1 U6.23 | length 5.5
  Top Layer w0.2: pad.1 -10.373,6.239 U6.23 ; pad.1@-11.608,5.304 ccw(c-11.608,6.028) -11.096,5.516 ccw(c-10.584,5.004) pad.1@-11.308,5.004 ; pad.1@-11.608,5.504 ccw(c-11.608,6.711) -10.754,5.857 ccw(c-9.901,5.004) pad.1@-11.108,5.004
RSTN: J1.6 U6.8 | length 25.7
  Top Layer w0.2: J1.6 -10.465,-6.19 -10.465,-5.149 v1(-10.465,-2.921) ; U6.8 -4.874,8.639 v1(-4.47,9.042) ; v1@-4.67,9.042 cw(c-5.153,9.042) -4.812,8.701 cw(c-4.47,8.36) v1@-4.47,8.842
  Bottom Layer w0.2: v1(-10.465,-2.921) -10.465,1.092 -9.855,1.702 -4.267,1.702 -3.658,2.311 -3.658,5.664 -4.47,6.477 v1(-4.47,9.042) ; v1@-4.612,8.901 cw(c-4.953,8.56) -4.47,8.56 cw(c-3.988,8.56) v1@-4.329,8.901
RX2/SETKEY: C40.1 P1.1 U6.21 | length 16.7
  Top Layer w0.2: C40.1 -13.514,7.039 -12.446,7.039 ; C40.1@-13.569,6.893 cw(c-13.216,6.539) -13.216,7.039 ; C40.1@-13.428,6.751 cw(c-12.733,6.057) -12.733,7.039 ; C40.1@-13.428,7.176 ccw(c-13.098,7.505) -13.098,7.039 ; v1@-12.587,7.606 cw(c-12.929,7.264) -12.446,7.264 cw(c-11.963,7.264) v1@-12.305,7.606 ; v1(-12.446,7.747) -12.446,7.039 ; v1(-12.421,15.596) -12.421,17.094 P1.1 ; U6.21 -12.446,7.039
  Bottom Layer w0.2: v1(-12.446,7.747) -12.421,7.772 v1(-12.421,15.596)
SCL: R2.2 U6.25 UB1.6 | length 12.4
  Top Layer w0.2: v1(-13.081,0.025) -13.081,0.219 -9.045,4.255 U6.25
  Bottom Layer w0.2: R2.2 -13.081,-0.652 v1(-13.081,0.025) UB1.6@-13.081,1.388 ; v1@-13.222,0.167 ccw(c-13.564,0.508) -13.081,0.508 ccw(c-12.598,0.508) v1@-12.94,0.167 ; UB1.6@-13.222,0.568 cw(c-13.564,0.226) -13.081,0.226 cw(c-12.598,0.226) UB1.6@-12.94,0.568 ; v1@-13.193,0.191 ccw(c-13.291,0.336) -13.122,0.381 ccw(c-12.835,0.458) v1@-12.982,0.199 ; v1@-13.18,0.199 ccw(c-13.327,0.458) -13.04,0.381 ccw(c-12.871,0.336) v1@-12.969,0.191
SDA: R3.2 U6.26 UB1.5 | length 11.5
  Top Layer w0.2: v1(-11.786,-0.102) -11.786,0.949 -8.645,4.089 U6.26
  Bottom Layer w0.2: UB1.5@-11.952,0.568 cw(c-12.355,0.165) v1@-11.786,0.165 ; v1@-11.927,0.04 ccw(c-12.268,0.381) -11.786,0.381 ccw(c-11.303,0.381) v1@-11.644,0.04 ; v1@-11.918,0.049 ccw(c-12.104,0.261) -11.831,0.334 ; R3.2 -11.786,-1.287 v1(-11.786,-0.102) -11.786,1.362 UB1.5@-11.811,1.388 ; -11.801,0.222 ccw(c-11.562,0.286) v1@-11.686,0.072 ; -11.786,0.288 cw(c-11.389,0.288) UB1.5@-11.67,0.568
TD1_KEYX_1: pad.2 U6.24 | length 6.5
  Top Layer w0.2: pad.2 -9.645,5.036 U6.24 ; pad.2@-11.557,3.424 ccw(c-11.557,4.148) -11.045,3.636 ccw(c-10.533,3.124) pad.2@-11.257,3.124 ; pad.2@-11.557,3.624 ccw(c-11.557,4.831) -10.703,3.978 ccw(c-9.85,3.124) pad.2@-11.057,3.124
TIANX: C30.2 C32.2 P2.5 | length 6.1
  Top Layer w0.6: P2.5@-6.038,-5.575 ccw(c-6.51,-5.102) -5.842,-5.102 ; -5.842,-4.852 ccw(c-4.82,-4.852) P2.5@-5.543,-5.575 ; C30.2 C32.2 -5.842,-6.12 P2.5
V6V: C1.1 C2.1 Q1.D R47.2 U1.4 | length 35.8
  Top Layer w0.6: Q1.D v1(10.947,6.274) ; R47.2 11.989,17.729 12.319,17.399 v1(12.319,15.138)
  Bottom Layer w0.6: v1(10.947,6.274) 12.319,6.274 ; v1(12.319,15.138) 12.319,6.274 ; C1.1 18.771,5.055 ; 19.206,5.055 ccw(c19.206,5.987) C2.1@19.865,5.328 ; C2.1 20.143,5.055 18.771,5.055 ; 12.319,6.274 12.319,0.483 12.852,-0.051 17.729,-0.051 18.847,1.067 U1.4 18.847,4.978 18.771,5.055
VBAT: C21.1 C22.1 D1.2 Q1.S R10.1 R18.1 U4.3 | length 52.4
  Top Layer w0.6: R18.1@0.792,13.243 2.683,13.243 v1(3.556,12.37) ; D1.2 11.347,-2.267 12.014,-1.6 12.014,0.813 ; D1.2@9.67,-2.691 cw(c10.694,-3.716) 10.694,-2.267 cw(c10.694,-0.819) D1.2@9.67,-1.843 ; U4.3 11.938,0.737 12.014,0.813 ; U4.3@10.266,0.737 cw(c10.266,-2.012) C21.1@12.21,-0.068 ; v1(10.338,2.845) 11.989,2.845 12.014,2.87 ; Q1.S 11.981,4.242 ; 10.727,2.845 cw(c10.727,0.693) C22.1@12.248,2.214 ; 10.953,4.242 ccw(c10.953,6.261) R10.1@12.381,4.833 ; 11.715,0.737 cw(c11.715,-0.563) C21.1@12.634,0.356 ; 12.014,-1.654 cw(c13.682,-1.654) C21.1@12.591,-0.392 ; 12.014,1.208 cw(c13.296,1.208) C22.1@12.39,2.114 ; 12.014,1.756 ccw(c14.034,1.756) C21.1@12.606,0.328 ; C22.1@12.014,2.003 ccw(c12.213,2.003) C22.1@12.143,1.817 ; 12.014,3.152 cw(c14.062,3.152) R10.1@12.614,4.6 ; 12.014,3.262 ccw(c13.296,3.262) C22.1@12.39,2.356 ; 12.175,2.845 cw(c12.175,2.141) C22.1@12.673,2.639 ; R10.1 12.048,4.242 11.981,4.242 ; 11.981,4.242 12.014,4.208 12.014,2.87 ; 12.014,0.813 ccw(c12.417,0.813) 12.412,0.41 cw(c12.417,0.813) 12.014,0.813 ; 12.014,0.813 12.014,2.87 ; 12.014,2.87 ccw(c12.539,2.87) 12.354,2.379 cw(c12.539,2.87) 12.014,2.87 ; 12.014,4.015 cw(c12.552,4.015) 12.51,4.552 ccw(c12.552,4.015) 12.014,4.015
  Bottom Layer w0.6: v1(3.556,12.37) 6.13,12.37 9.512,8.988 9.512,3.67 v1(10.338,2.845)
VDD: C28.2 C33.2 C35.2 C36.2 C44.2 L3.1 U6.1 U6.22 U6.31 | length 49.1
  Top Layer w0.2: C35.2 -12.096,6.639 U6.22 ; v1(-6.934,2.565) -6.645,2.854 ; v1@-6.909,2.764 ccw(c-6.87,3.078) -6.645,2.854 ; v1@-6.736,2.59 cw(c-6.421,2.63) -6.645,2.854 ; U6.31 -6.645,2.854 ; U6.1 -4.391,5.839 -3.835,5.283 C33.2 ; L3.1 L3.1@-5.436,12.725
  Top Layer w0.3: C28.2@-13.817,1.684 ccw(c-14.243,2.111) -13.64,2.111 ccw(c-13.036,2.111) C28.2@-13.463,1.684 ; C36.2@-13.817,3.049 cw(c-14.243,2.623) -13.64,2.623 cw(c-13.036,2.623) C36.2@-13.463,3.049 ; C36.2@-13.817,3.503 ccw(c-14.243,3.93) -13.64,3.93 ccw(c-13.036,3.93) C36.2@-13.463,3.503 ; C35.2@-13.817,4.868 cw(c-14.243,4.441) -13.64,4.441 cw(c-13.036,4.441) C35.2@-13.463,4.868 ; v1@-13.76,2.655 ccw(c-13.992,2.825) C36.2@-13.714,2.9 ; v1@-13.746,2.459 cw(c-14.002,2.203) -13.64,2.203 cw(c-13.278,2.203) v1@-13.534,2.459 ; v1@-13.746,2.671 ccw(c-14.002,2.928) -13.64,2.928 ccw(c-13.278,2.928) v1@-13.534,2.671 ; v1@-13.715,2.695 ccw(c-13.871,2.965) C36.2@-13.57,2.885 ; C36.2@-13.71,2.885 ccw(c-13.409,2.965) v1@-13.565,2.695 ; C28.2 v1(-13.64,2.565) C36.2 C35.2 ; C36.2@-13.566,2.9 ccw(c-13.288,2.825) v1@-13.519,2.655 ; L3.1@-5.663,12.448 cw(c-6.09,12.021) -5.486,12.021 cw(c-4.883,12.021) L3.1@-5.31,12.448 ; C44.2@-5.612,14.099 cw(c-6.039,13.672) -5.436,13.672 cw(c-4.832,13.672) C44.2@-5.259,14.099 ; v1@-5.592,11.409 ccw(c-5.849,11.665) -5.486,11.665 ccw(c-5.124,11.665) v1@-5.38,11.409 ; v1(-5.486,11.303) L3.1 ; L3.1@-5.436,12.725 C44.2 ; v1(-4.597,4.369) -3.886,4.369 ; v1@-4.491,4.263 cw(c-4.235,4.007) -4.235,4.369 cw(c-4.235,4.731) v1@-4.491,4.475
  Bottom Layer w0.3: v1(-13.64,2.565) v1(-6.934,2.565) -5.893,2.565 -5.486,2.972 -5.486,4.369 ; v1@-13.534,2.459 cw(c-13.278,2.203) -13.278,2.565 cw(c-13.278,2.928) v1@-13.534,2.671 ; v1@-7.04,2.459 ccw(c-7.296,2.203) -7.296,2.565 ccw(c-7.296,2.928) v1@-7.04,2.671 ; v1@-6.828,2.459 cw(c-6.572,2.203) -6.572,2.565 cw(c-6.572,2.928) v1@-6.828,2.671 ; v1@-5.592,11.197 cw(c-5.849,10.941) -5.486,10.941 cw(c-5.124,10.941) v1@-5.38,11.197 ; v1(-5.486,11.303) -5.486,4.369 ; v1@-4.703,4.263 ccw(c-4.96,4.007) -4.96,4.369 ccw(c-4.96,4.731) v1@-4.703,4.475 ; v1(-4.597,4.369) -5.486,4.369
VDD3V3: Q2.D R6.1 U2.4 | length 26.9
  Top Layer w0.4: v1(2.286,7.366) 2.464,7.188 2.464,-3.378 v1(3.785,-4.699) ; v1(6.35,6.96) 6.745,6.565 Q2.D ; Q2.D@6.563,5.414 ccw(c6.124,5.853) 6.745,5.853 ccw(c7.366,5.853) Q2.D@6.927,5.414
  Bottom Layer w0.4: R6.1@-0.246,5.902 ccw(c-0.699,6.354) -0.059,6.354 ccw(c0.581,6.354) R6.1@0.129,5.902 ; R6.1 -0.059,7.002 0.305,7.366 v1(2.286,7.366) 5.944,7.366 v1(6.35,6.96) ; U2.4 3.023,-3.937 v1(3.785,-4.699) ; U2.4@3.123,-3.8 ccw(c3.694,-3.8) 3.29,-4.204
pads on no net: U1. U1.1 U2.12 U2.13 U2.14 U6.9 U6.13 UB1. UB1.3 UB1.7 Y2.3

## Polygon pours and split planes (outlines as drawn)
GND on Bottom Layer "Top Layer-No Net" (solid, remove dead copper, pour order 3): -24.206,23.216 22.2,23.216 24.181,21.234 24.536,20.879 24.536,-10.16 24.384,-10.312 -24.028,-10.312 -24.994,-9.347 -24.994,22.327
GND on Top Layer "Top Layer-No Net" (solid, remove dead copper, pour order 3): -24.206,23.216 22.2,23.216 24.181,21.234 24.536,20.879 24.536,-10.16 24.384,-10.312 -24.028,-10.312 -24.994,-9.347 -24.994,22.327

## Keep-outs
Keep-Out Layer:
  circle w0.127: c15.005,11.012 r1.65
  circle w0.127: c-19.995,0.012 r1.65
  pour cut-out: -22.19,0 ccw(c-19.99,0) -19.99,-2.2 ccw(c-19.99,0) -17.79,0 ccw(c-19.99,0) -19.99,2.2 ccw(c-19.99,0)
  pour cut-out: 12.811,10.998 ccw(c15.011,10.998) 15.011,8.798 ccw(c15.011,10.998) 17.211,10.998 ccw(c15.011,10.998) 15.011,13.198 ccw(c15.011,10.998)
  lines w0.127: -21.952,-8.954 cw(c0.005,0.012) -7.272,22.585 cw(c-6.658,20.681) -4.684,21.001 ccw(c0.005,21.762) 4.694,21.001 cw(c6.668,20.681) 7.281,22.585 cw(c0.005,0.012) 21.636,-9.715 -21.952,-8.954

## Other copper
Top Layer:
  pour cut-out: -6.401,5.588 -5.258,5.588 -4.928,5.258 -4.928,-6.883 -5.232,-7.188 -6.477,-7.188 -6.782,-6.883 -6.782,5.207
  region net VBAT: 10.033,4.978 12.802,4.978 12.979,4.801 12.979,-2.667 12.725,-2.921 9.779,-2.921 9.779,4.724
  region net NetL2_2: -6.325,2.769 -6.299,2.743 -5.436,2.743 -5.41,2.769 -5.41,5.296 -5.651,5.537 -6.274,5.537 -6.325,5.486
Bottom Layer:
  pour cut-out: -6.401,5.588 -5.258,5.588 -4.928,5.258 -4.928,-6.883 -5.232,-7.188 -6.477,-7.188 -6.782,-6.883 -6.782,5.207

## Silkscreen, mask and mechanical layers (free items; w line width, h text height)
Top Overlay:
  circle w0.127: c15.011,10.998 r2.2
  circle w0.127: c-19.99,0 r2.2
  text "RD" at -10.109,2.997 h0.8
  text "TD" at -10.109,1.905 h0.8
  text "TSKZB_V1.1" at 20.7,-3.042 h0.8 r90
  text "2020-11-13" at 22.173,-3.042 h0.8 r90
  text "M+" at 14.097,-4.343 h0.8
  text "M-" at 16.307,-4.369 h0.8
  text "M3V3" at -22.225,-5.639 h0.8
  text "GND" at -10.574,-5.877 h0.8
  text "BAT" at 1.372,-8.509 h0.8
  text "GND" at -4.775,-8.56 h0.8
Bottom Overlay:
  text "GND" at -8.382,-5.486 h0.8
  text "M3V3" at -19.253,-5.69 h0.8